# Altium PCB CRAFT_Current_Sense_Circuit_AJefferson_PCB.PcbDoc
Units mil, origin at the board's own origin, x right, y up, seen from the top; angles counter-clockwise.
Board outline 3500 x 3500 mil, 2 copper layers (Top Layer, Bottom Layer), stack 27.8 mil thick; 32 components, 28 nets, 114 pads, 0 vias.
Unrouted connection lines stored in the file: 1.
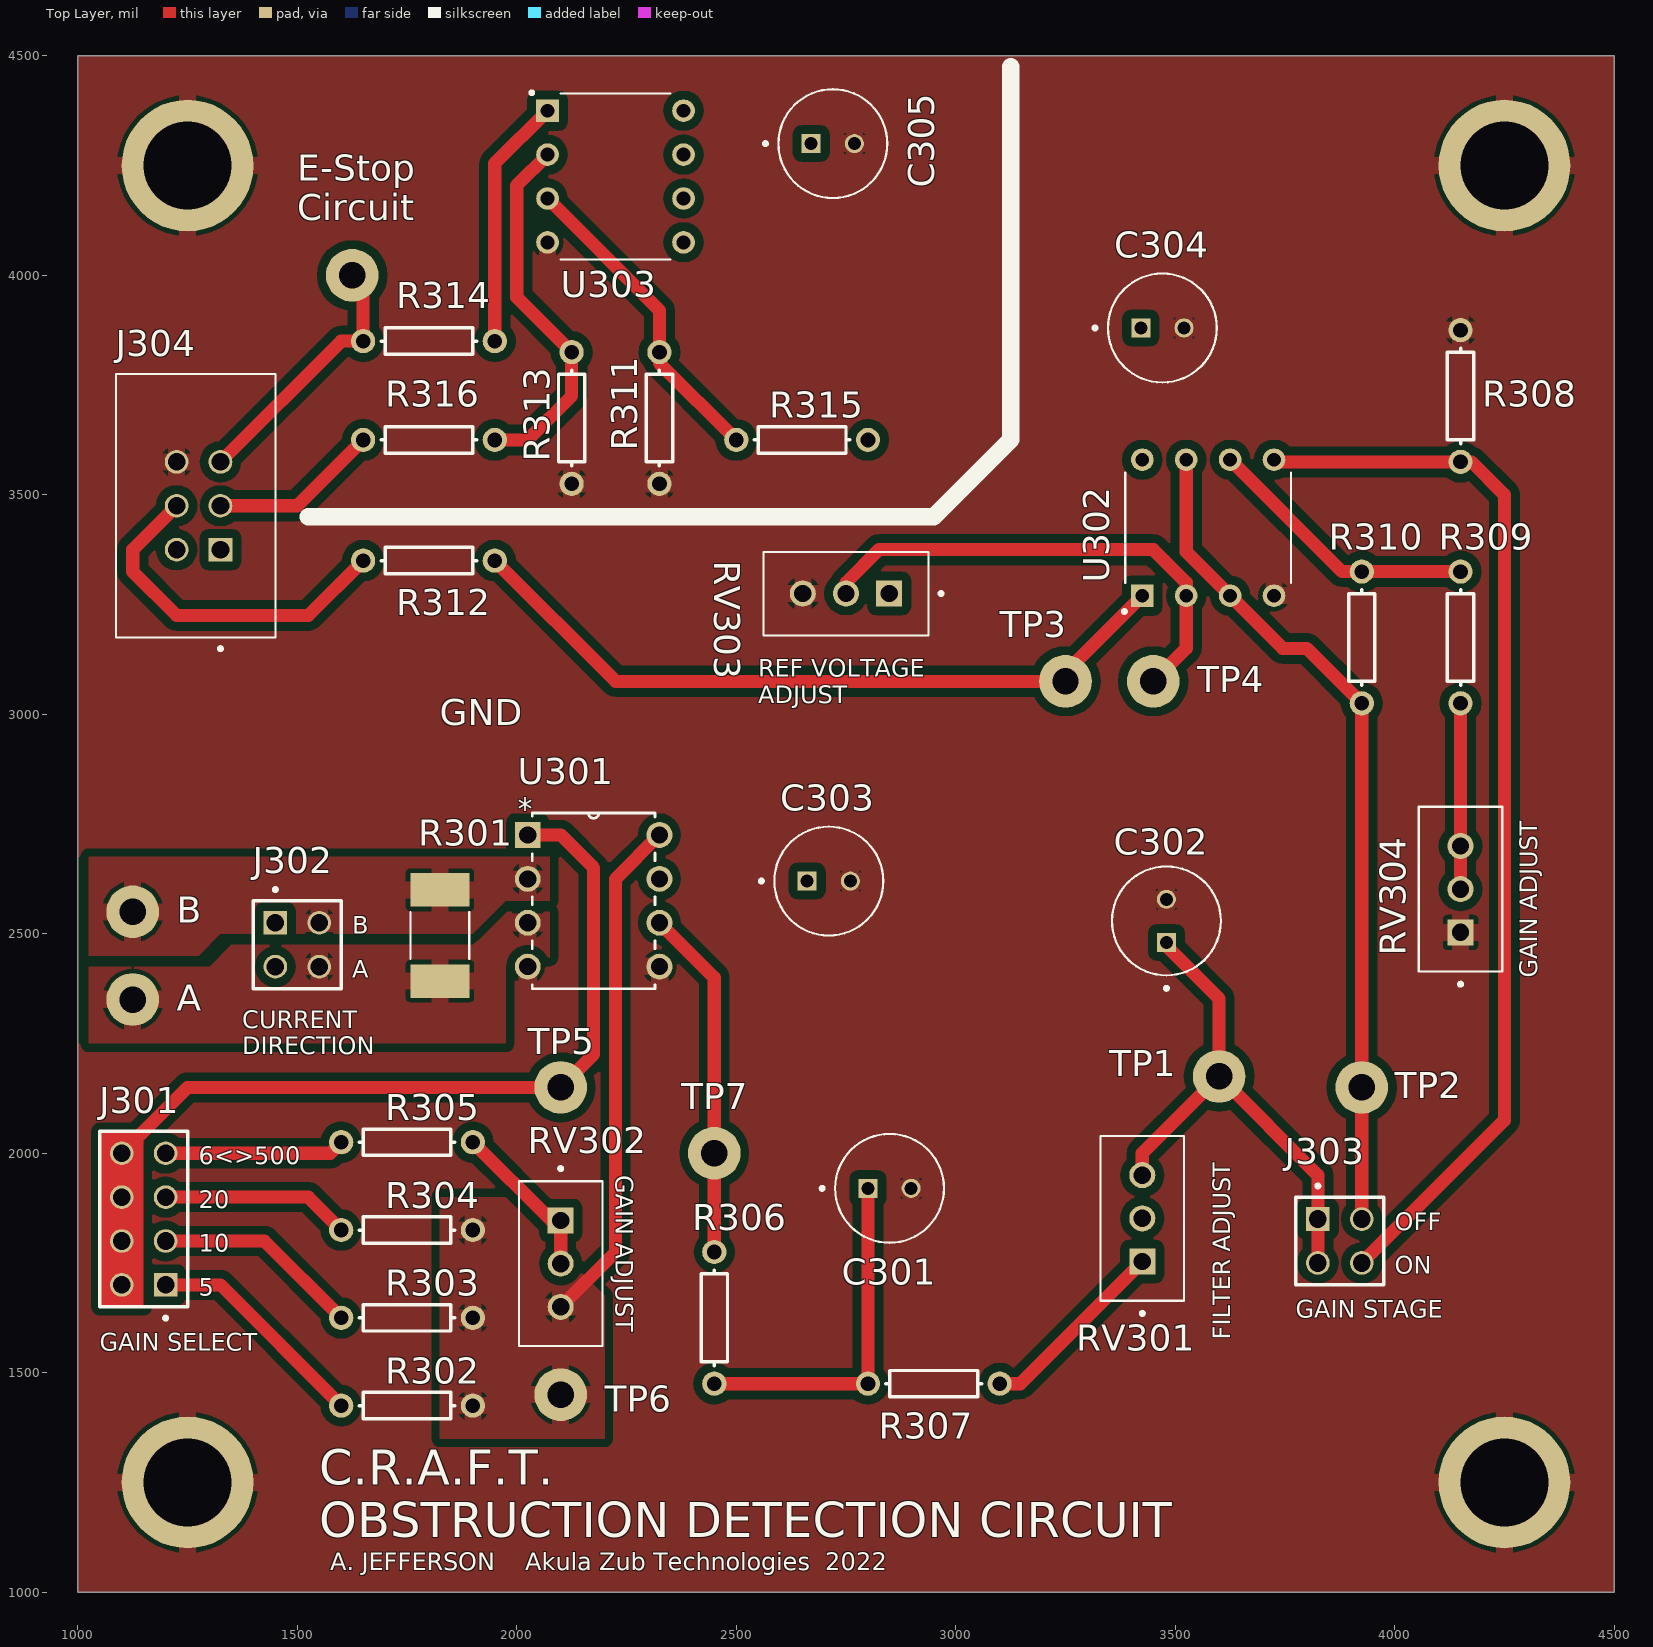
[diagram p0: Top Layer view]
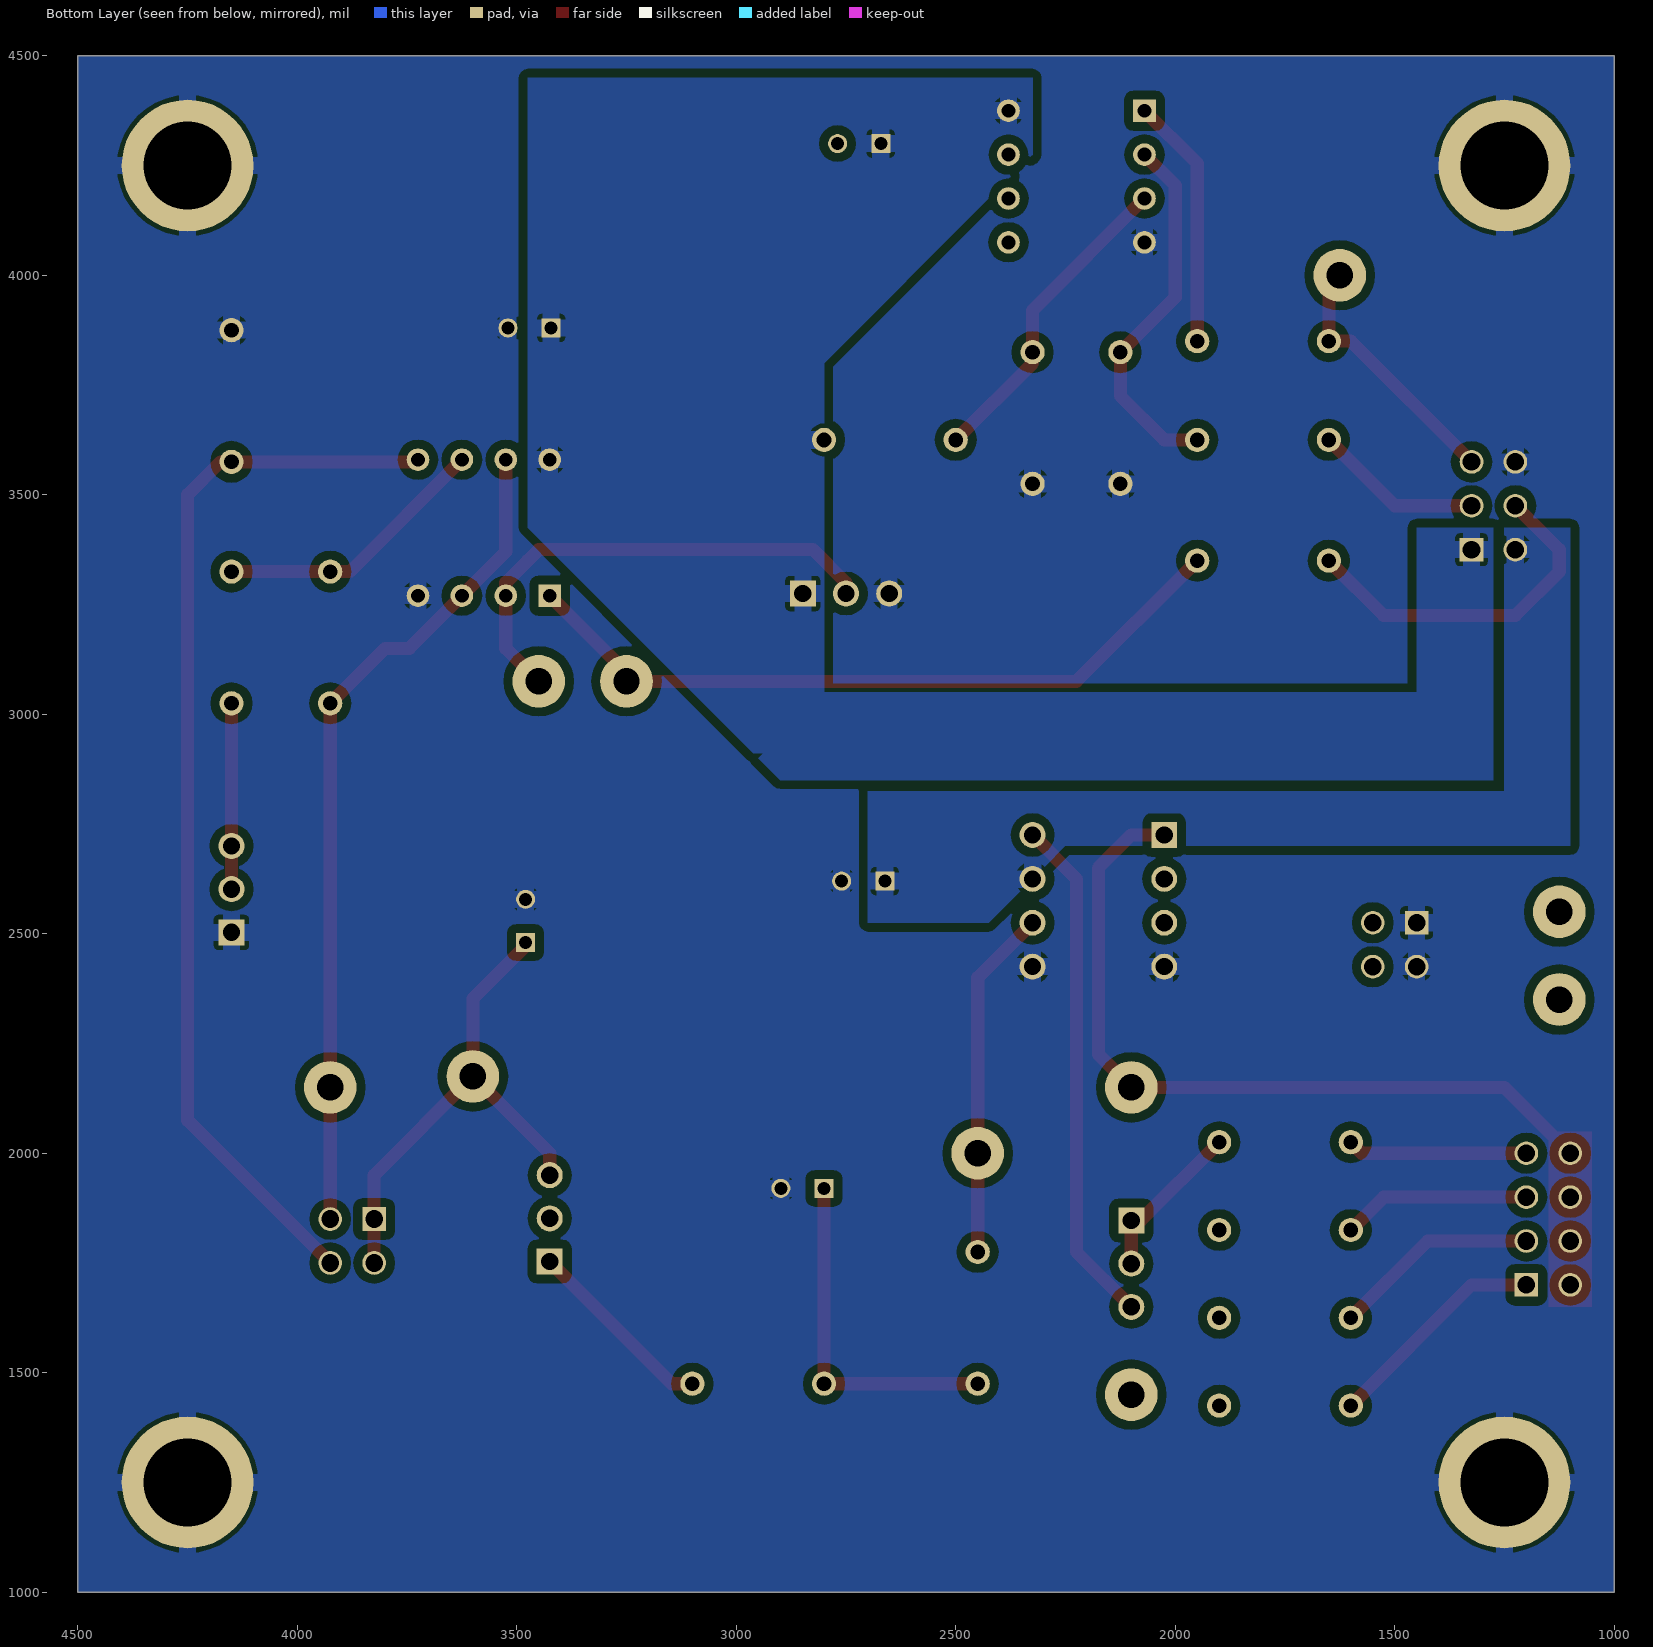
[diagram p1: Bottom Layer view, seen from below]

## Layer stack, top to bottom
Top Solder: solder mask 0.4, Solder Resist, Dk 3.5
Top Layer: signal copper 1.4
Dielectric 1: core 10, FR-4, Dk 4.2
Dielectric 3: prepreg 5, Dk 4.2
Dielectric 2: core 10, Dk 4.2
Bottom Layer: signal copper 1.4
Bottom Solder: solder mask 0.4, Solder Resist, Dk 3.5

## Board outline
1000,1000 4500,1000 4500,4500 1000,4500

## Design rules (kind name [scope] priority, off if disabled: settings)
Clearance [All] p1: gap=19.68 ignorepadtopadclearanceinfootprint=FALSE
ComponentClearance [All] p1: gap=0 collisioncheckmode=3 verticalgap=0 showdistances=FALSE
Height [All] p1: minheight=0 maxheight=3000 prefheight=500
PasteMaskExpansion [All] p1: expansion=1.97
PlaneConnect [All] p1: planeconnectstyle=Relief reliefexpansion=20 reliefentries=4 reliefconductorwidth=40 reliefairgap=10
PolygonConnect [All] p1: connectstyle=Relief reliefconductorwidth=40 reliefentries=4 polygonreliefangle="90 Angle" airgapwidth=10
RoutingTopology [All] p1: topology=Daisy_Balanced
RoutingVias [All] p1: holewidth=28 width=50 viastyle="Through Hole" minholewidth=7.87 minwidth=50 maxholewidth=248.03 maxwidth=50
SilkToSolderMaskClearance [IsPad] p1: minsilkscreentomaskgap=10 clearancetoexposedcopper=FALSE
SolderMaskExpansion [All] p1: expansion=4
Width [All] p1: maxlimit=60 minlimit=30 preferedwidth=30
24 further rules are at their usual default settings.

## Classes and differential pairs
component class CRAFT_E_Stop_AJefferson: C305 R311 R313 R314 R315 R316 U303
component class CRAFT_Current_Sense_Circuit_AJefferson: C301 C302 C303 C304 J301 J302 J303 J304 R301 R302 R303 R304 R305 R306 R307 R308 R309 R310 R312 RV301 RV302 RV303 RV304 U301 U302
net class Ground: GND
polygon class Ground: "Bottom Layer-No Net"

## Components (designator, comment, footprint, x,y, rotation, side; value= is the part's Value field where it differs from the comment)
C301 "Cap Pol1" CAPPRD250W50D630H1120 2849.21,1920 r0 top value=10uF
C302 "Cap Pol1" CAPPRD250W50D630H1120 3480,2529.21 r90 top value=10uF
C303 "Cap Pol1" CAPPRD250W50D630H1120 2710.79,2620 r0 top value=10uF
C304 "Cap Pol1" CAPPRD250W50D630H1120 3470.79,3880 r0 top value=10uF
C305 "Cap Pol1" CAPPRD250W50D630H1120 2720,4300 r0 top value=10uF
J301 "TSW-104-08-T-D" SAMTEC_TSW-104-08-T-D 1200,1700 r90 top
J302 "TSW-102-23-T-D" SAMTEC_TSW-102-23-T-D 1450,2525 r270 top
J303 "TSW-102-23-T-D" SAMTEC_TSW-102-23-T-D 3825,1850 r270 top
J304 "1761681-1" TE_1761681-1 1325,3375 r90 top
R301 "TLRH3APTTE50L0F" RESC6332X70N 1825,2496.06 r270 top
R302 "Res1" AXIAL-0.3 1750,1425 r180 top value=12.7k
R303 "Res1" AXIAL-0.3 1750,1625 r180 top value=5.56k
R304 "Res1" AXIAL-0.3 1750,1825 r180 top value=2.67k
R305 "Res1" AXIAL-0.3 1750,2025 r180 top value=100
R306 "Res1" AXIAL-0.3 2450,1625 r270 top value=100
R307 "Res1" AXIAL-0.3 2950,1475 r0 top value=100
R308 "Res1" AXIAL-0.3 4150,3725 r270 top value=470k
R309 "Res1" AXIAL-0.3 4150,3175 r90 top value=1K
R310 "Res1" AXIAL-0.3 3925,3175 r270 top value=1K
R311 "5%" AXIAL-0.3 2325,3675 r90 top value=1K
R312 "3k" AXIAL-0.3 1800,3350 r180 top
R313 "5%" AXIAL-0.3 2125,3675 r90 top value=7k
R314 "5%" AXIAL-0.3 1800,3850 r180 top value=3k
R315 "5%" AXIAL-0.3 2650,3625 r0 top value=7k
R316 "5%" AXIAL-0.3 1800,3625 r180 top value=7k
RV301 "PV36W103C01B00" TRIM_PV36W103C01B00 3425,1851.57 r90 top
RV302 "PV36W103C01B00" TRIM_PV36W103C01B00 2100,1748.43 r270 top
RV303 "PV36W103C01B00" TRIM_PV36W103C01B00 2750,3275 r180 top
RV304 "PV36W103C01B00" TRIM_PV36W103C01B00 4150,2601.57 r90 top
U301 "AD622ANZ" DIP254P762X533-8 2325,2425 r0 top
U302 "MCP6002-E/P" DIP787W46P254L927H533Q8 3575,3425 r90 top
U303 "MCP6002-E/P" DIP787W46P254L927H533Q8 2225,4225 r0 top

## Footprints (in the part's own frame and the unit in brackets; to place one, negate y for a bottom-side part, rotate by r counter-clockwise, add the part's x,y. Pads: shape width x height; smd on the part's side, far side on the other; paste and mask are expansions set on the pad)
AXIAL-0.3 [mm] "Axial Device, Thru-Hole; 2 Leads; 0.3 in Pin Spacing"
  round 1.4 hole 0.85: 1(-3.81,0) 2(3.81,0)
  silkscreen extent -2.77,-0.76 2.77,0.76
CAPPRD250W50D630H1120 [mm]
  round 1.1 hole 0.75: N(1.25,0)
  rect 1.1x1.1 hole 0.75: P(-1.25,0)
  silkscreen extent -4,-3.15 3.15,3.15, body extent -3.15,-3.15 3.15,3.15, height 11.2
DIP254P762X533-8 [mil]
  rect 59x59 hole 39: 1(-300,300)
  round 59 hole 39: 2(-300,200) 3(-300,100) 4(-300,0) 5(0,0) 6(0,100) 7(0,200) 8(0,300)
  silkscreen extent -290,-50 -10,350
DIP787W46P254L927H533Q8 [mm]
  rect 1.308x1.308 hole 0.8: 1(-3.935,3.81)
  round 1.308 hole 0.8: 2(-3.935,1.27) 3(-3.935,-1.27) 4(-3.935,-3.81) 5(3.935,-3.81) 6(3.935,-1.27) 7(3.935,1.27) 8(3.935,3.81)
  silkscreen extent -4.95,-4.8 3.18,4.95
RESC6332X70N [mm]
  rect 1.94x3.42 smd: 1(-2.64,0) 2(2.64,0)
  silkscreen extent -1.35,-1.7 1.35,1.7
SAMTEC_TSW-102-23-T-D [mm]
  rect 1.37x1.37 hole 1.02: 01(0,0)
  round 1.37 hole 1.02: 02(0,2.54) 03(2.54,0) 04(2.54,2.54)
  silkscreen extent -2.02,-1.27 3.81,3.81
SAMTEC_TSW-104-08-T-D [mm]
  rect 1.37x1.37 hole 1.02: 01(0,0)
  round 1.37 hole 1.02: 02(0,2.54) 03(2.54,0) 04(2.54,2.54) 05(5.08,0) 06(5.08,2.54) 07(7.62,0) 08(7.62,2.54)
  silkscreen extent -2.02,-1.27 8.89,3.81
TE_1761681-1 [mm]
  rect 1.37x1.37 hole 1.02: 1(0,0)
  round 1.37 hole 1.02: 2(0,2.54) 3(2.54,0) 4(2.54,2.54) 5(5.08,0) 6(5.08,2.54)
  silkscreen extent -5.83,-3.18 10.16,6.04
TRIM_PV36W103C01B00 [mm]
  rect 1.508x1.508 hole 1: 1(-2.5,0)
  round 1.508 hole 1: 2(0,0) 3(2.5,0)
  silkscreen extent -5.6,-2.41 4.76,2.42

## Part data
C301 C302 C303 C304 C305: "Polarized Capacitor (Radial)", LatestRevisionDate=17-Jul-2002, LatestRevisionNote="Re-released for DXP Platform.", PackageDescription="Polarized Capacitor (Radial); 2 Leads", PackageReference=RB7.6-15, Published=8-Jun-2000, Publisher="Altium Limited"
J301 J302 J303 J304: Package=None, Availability=Unavailable, Price=None
  J301: MP=TSW-104-08-T-D
  J302 J303: MP=TSW-102-23-T-D
  J304: MF="{'manufacturer': 'TE Connectivity'}", MP=1761681-1
R301: library part TLRH3APTTE47L0F, "Res Metal Plate 2512 0.047 Ohm 1% 4W ±50ppm/C Pad SMD Automotive T/R", Package=None, Availability=Unavailable, MP=TLRH3APTTE47L0F, Price=None
R302 R303 R304 R305 R306 R307 R308 R309 R310: "Resistor", LatestRevisionDate=17-Jul-2002, LatestRevisionNote="Re-released for DXP Platform.", PackageDescription="Axial Device, Thru-Hole; 2 Leads; 0.3 in Pin Spacing", PackageReference=AXIAL-0.3, Published=8-Jun-2000, Publisher="Altium Limited"
R311 R312 R313 R314 R315 R316: library part Res1, "Resistor", LatestRevisionDate=17-Jul-2002, LatestRevisionNote="Re-released for DXP Platform.", PackageDescription="Axial Device, Thru-Hole; 2 Leads; 0.3 in Pin Spacing", PackageReference=AXIAL-0.3, Published=8-Jun-2000, Publisher="Altium Limited"
RV301 RV302 RV303 RV304: "10 kOhms 0.5W, 1/2W PC Pins Through Hole Trimmer Potentiometer Cermet 25 Turn Top Adjustment", Package="6332 Bourns", Availability=Unavailable, MF=Bourns, MP=PV36W103C01B00, Price=None, SnapEDA_Link=https://www.snapeda.com/parts/PV36W103C01B00/Bourns/view-part/1439094/?ref=snap
U301: "Instrumentation Amplifier 1 Circuit 8-PDIP", Package="PDIP-8 Analog Devices", Availability=Unavailable, MF="Analog Devices", MP=AD622ANZ, Price=None, SnapEDA_Link=https://www.snapeda.com/parts/AD622ANZ/Analog%20Devices%20Inc./view-part/207874/?ref=snap
U302 U303: "General Purpose Amplifier 2 Circuit Rail-to-Rail 8-PDIP", Package="DIP-8 Microchip", Availability=Unavailable, MF=Microchip, MP=MCP6002-E/P, Price=None, SnapEDA_Link=https://www.snapeda.com/parts/MCP6002-E/P/Microchip/view-part/228325/?ref=snap

## Free pads (board coordinates)
  round 120 hole 60: 2(3250,3075) 2(3450,3075) 3(1125,2350) 4(1125,2550) 6(3925,2150) 7(2100,2150) 8(2100,1450) 12(2450,2000) 15(1625,4000) TP1(3600,2175)
  round 300 hole 200: 16(1250,4250) 17(4250,4250) 18(4250,1250) 19(1250,1250)

## Nets (pads, with @x,y where several pads share a name; then routed paths per layer and width w, separated by ;. In a path a pad name is that pad's centre, name@x,y a point inside that pad or via, vN(x,y) a via of type N, cw(c..) or ccw(c..) an arc to the next point about the centre after c; other vN are vias at no path point)
+3.3V: C304.P C305.P J304.1 R315.2 RV303.1 U302.8 U303.8
+5V: C303.P J304.2 U301.7
Comp_Ref: pad.2@3450,3075 RV303.2 U302.2 | length 1118.2
  Top Layer w30: RV303.2 2750,3300 2825,3375 3450,3375 3475.32,3349.68 3475.32,3349.5 3525,3299.81 U302.2 3525,3150 pad.2@3450,3075
Comp_Sig_OUT: J304.4 R312.2 | length 809.6
  Top Layer w30: J304.4 1125,3375 1125,3325 1225,3225 1525,3225 R312.2
Current_A: J302.04 pad.3 R301.2 U301.3
Current_B: J302.02 pad.4 R301.1 U301.2
E_Stop: J304.3 R316.2 | length 387.1
  Top Layer w30: J304.3 1500,3475 R316.2
GND: C301.N C302.N C303.N C304.N C305.N J302.01 J302.03 J304.6 pad.16 pad.17 pad.18 pad.19 R308.1 R311.1 R313.1 RV303.3 RV304.1 U301.4 U301.5 U302.4 U303.4
NetC301_1: C301.P R306.2 R307.1 | length 800
  Top Layer w30: R306.2 R307.1 C301.P C301.P@2800,1925
NetJ301_01: J301.01 R302.2 | length 513.9
  Top Layer w30: J301.01 1325,1700 R302.2
NetJ301_03: J301.03 R303.2 | length 472.5
  Top Layer w30: J301.03 1425,1800 R303.2
NetJ301_05: J301.05 R304.2 | length 431.1
  Top Layer w30: J301.05 1525,1900 R304.2
NetJ301_07: J301.07 R305.2 | length 410.4
  Top Layer w30: J301.07 1575,2000 R305.2
NetR305_1: R305.1 RV302.1 RV302.2 | length 372.2
  Top Layer w30: R305.1 2078.15,1846.85 RV302.1 RV302.2
NetR307_2: R307.2 RV301.1 RV301.2 | length 440.2
  Top Layer w30: R307.2 3146.85,1475 RV301.1
NetR309_1: R309.1 RV304.2 RV304.3 | length 423.4
  Top Layer w30: RV304.2 RV304.3 R309.1
NetR311_2: R311.2 R315.1 U303.3 | length 728.1
  Top Layer w30: U303.3 2325,3920.08 R311.2 2325,3800 R315.1
NetR312_1: pad.2@3250,3075 R312.1 U302.1 | length 1681.5
  Top Layer w30: R312.1 2225,3075 3250,3075 3250,3095.08 U302.1
NetR313_2: R313.2 R316.1 U303.2 | length 847.2
  Top Layer w30: R316.1 2025,3625 2125,3725 R313.2 2000,3950 2000,4204.92 U303.2
NetR314_1: R314.1 U303.1 | length 574.7
  Top Layer w30: R314.1 1950,4254.92 U303.1
Power_State: J304.5 pad.15 R314.2 | length 599.3
  Top Layer w30: J304.5 1600,3850 R314.2 1650,3975 pad.15
RG1: J301.02 J301.04 J301.06 J301.08 pad.7 U301.1 | length 1774.3
  Top Layer w30: J301.08 1250,2150 pad.7 2175,2225 2175,2650 2100,2725 U301.1
RG2: pad.8 R302.1 R303.1 R304.1 RV302.3 U301.8 | length 1168.2
  Top Layer w30: RV302.3 2225,1775 2225,2625 U301.8
TP7: pad.12 R306.1 U301.6 | length 801.8
  Top Layer w30: U301.6 2450,2400 pad.12 R306.1
VINB+: J303.04 R308.2 U302.5 | length 2442.7
  Top Layer w30: U302.5 3729.92,3575 R308.2 4175,3575 4250,3500 4250,2075 J303.04
VINB-: R309.2 R310.1 U302.6 | length 630.6
  Top Layer w30: U302.6 3879.92,3325 R310.1 R309.2
VOUTB: J303.02 pad.6 R310.2 U302.3 U302.7 | length 1927.8
  Top Layer w30: U302.7 3525,3370.08 U302.3 3745.08,3150 3800,3150 R310.2 pad.6 J303.02
Vsig_out: C302.P J303.01 J303.03 pad.TP1 RV301.3 | length 1169.8
  Top Layer w30: RV301.3 3425,2000 pad.TP1 ; C302.P@3475,2477.36 3600,2352.36 pad.TP1 ; J303.03 J303.01 3825,1950 pad.TP1
pads on no net: U303.5 U303.6 U303.7

## Polygon pours and split planes (outlines as drawn)
RG2 on Top Layer "Ground-No Net" (solid, pour order 12): 1825,1900 1975,1900 2200,1675 2200,1350 1825,1350
Current_A on Top Layer "Ground-No Net" (solid, pour order 10): 2075,2550 2075,2425 1975,2425 1975,2250 1250,2250 1025,2250 1025,2425 1300,2425 1350,2475 1900,2475 1975,2550
GND on Top Layer "Bottom Layer-No Net" (solid, pour order 34): 1000,4500 4500,4500 4500,1000 1000,1000
Current_B on Top Layer "Ground-No Net" (solid, pour order 8): 1025,2675 1750,2675 2075,2675 2075,2575 1975,2575 1900,2500 1325,2500 1275,2450 1025,2450
GND on Bottom Layer "Bottom Layer-No Net" (solid, pour order 32): 1000,4500 4500,4500 4500,1000 1000,1000
+3.3V on Bottom Layer "Bottom Layer-No Net" (solid, pour order 22): 2325,4450 3475,4450 3475,3425 2960.92,2910.92 2939.08,2910.92 2800,3050 2800,3800 2325,4275
+5V on Bottom Layer "Ground-No Net" (solid, pour order 14): 1100,2825 2700,2825 2700,2550 2700,2525 2425,2525 2250,2700 1100,2700
+3.3V on Bottom Layer "Ground-No Net" (solid, pour order 16): 1275,3050 2800,3050 2950,2900 2900,2850 2725,2850 1275,2850
+3.3V on Bottom Layer "Bottom Layer-No Net" (solid, pour order 28): 1275,3050 1275,3425 1450,3425 1450,3050
+5V on Bottom Layer "Bottom Layer-No Net" (solid, pour order 30): 1250,2825 1250,3425 1100,3425 1100,2825

## Other copper
Top Layer:
  rectangle net RG1: 1050,1650 1150,2050

## Silkscreen, mask and mechanical layers (free items; w line width, h text height)
Top Overlay:
  lines w40: 1525,3450 2950,3450 3125,3625 3125,4475
  text "E-Stop  / Circuit" at 1500,4125 h60
  text "TP3" at 3100,3175 h60
  text "TP4" at 3550,3050 h60
  text "REF VOLTAGE / ADJUST" at 2550,3025 h40
  text "GND" at 1825,2975 h60
  text "B" at 1225,2525 h60
  text "B" at 1625,2500 h40
  text "A" at 1625,2400 h40
  text "GAIN ADJUST" at 4325,2400 h40 r90
  text "A" at 1225,2325 h60
  text "CURRENT / DIRECTION" at 1375,2225 h40
  text "TP5" at 2025,2225 h60
  text "TP1" at 3350,2175 h60
  text "TP2" at 4000,2125 h60
  text "TP7" at 2375,2100 h60
  text "6<>500" at 1275,1975 h40
  text "GAIN ADJUST" at 2225,1950 h40 r270
  text "20" at 1275,1875 h40
  text "OFF" at 4000,1825 h40
  text "10" at 1275,1775 h40
  text "ON" at 4000,1725 h40
  text "5" at 1275,1675 h40
  text "GAIN STAGE" at 3775,1625 h40
  text "FILTER ADJUST" at 3625,1575 h40 r90
  text "GAIN SELECT" at 1050,1550 h40
  text "TP6" at 2200,1410.92 h60
  text "C.R.A.F.T.  / OBSTRUCTION DETECTION CIRCUIT" at 1550,1125 h80
  text "A. JEFFERSON    Akula Zub Technologies  2022" at 1575,1050 h40

## Dimensions
1000,1000 to 1000,4500 on Mechanical 13
1000,1000 to 4500,1000 on Mechanical 13
4250,1250 to 4500,990 on Mechanical 13
4250,1250 to 4500,1000 on Mechanical 13

## Text inside footprints (layer, text, board x,y; h text height)
U301: Top Overlay "*" at 2001.71,2759.3 h50.05; Mechanical 13 "*" at 2001.83,2759.18 h50.03